# EAGLE board PCB_v1.0 (EAGLE 9.7.0)
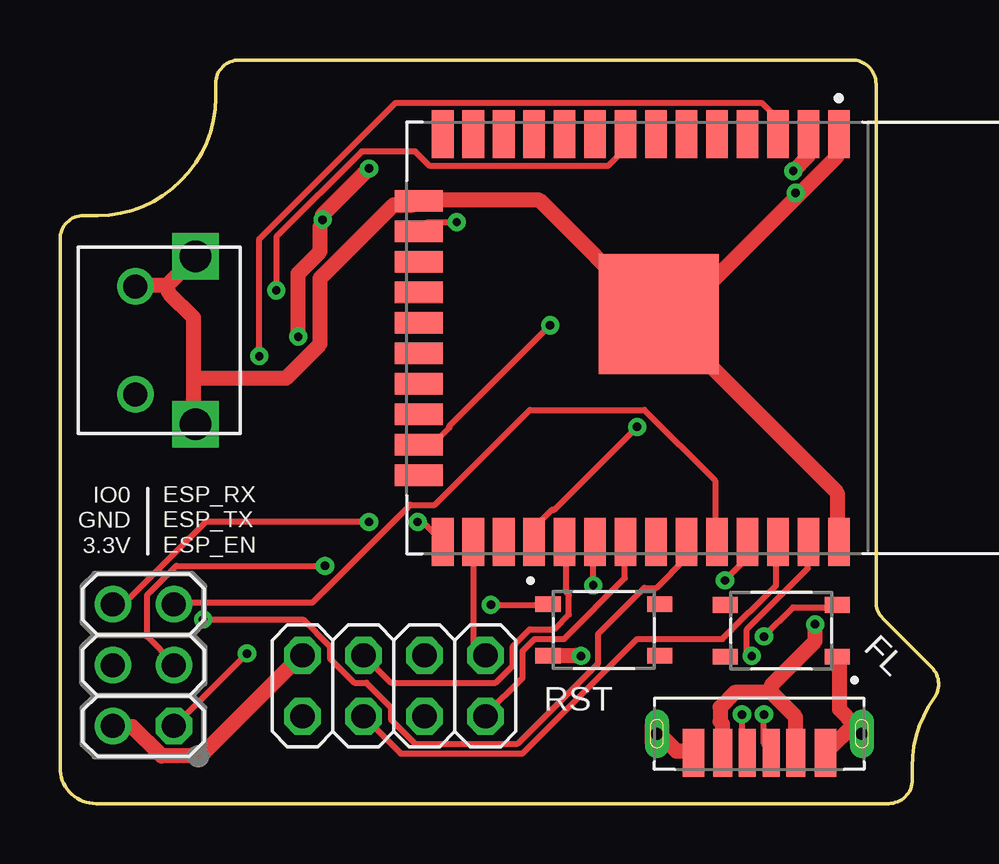
[diagram p0: board, top side]
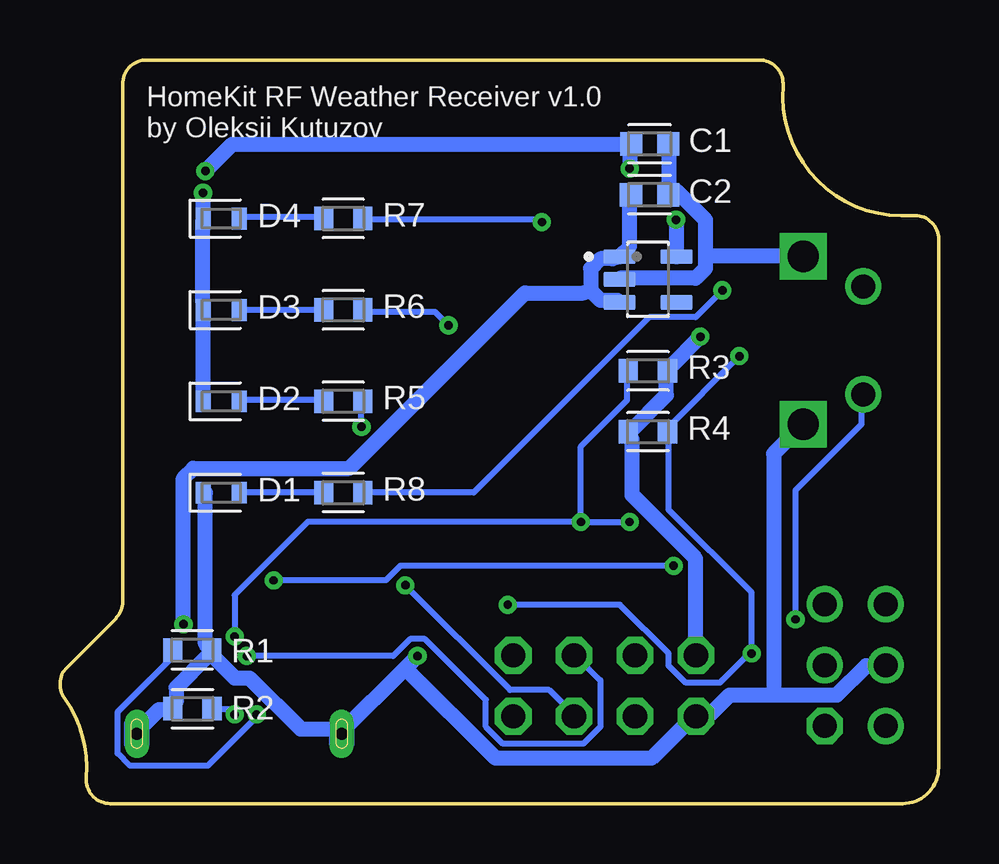
[diagram p1: board, bottom side, seen from below]

Size 36.61 x 31 mm. Coordinates in mm from the lower left corner, seen from the top.
Outline: 34.29,7.71 36.32,5.68 arc-80 36.42,4.4 arc40 35.52,1.08 arc-95 34.52,0 1.5,0 arc-90 0,1.5 0,23.52 arc-95 1.08,24.52 arc100 6.48,29.92 arc-95 7.48,31 33,31 arc-90 34,30 34,8.41 arc45 34.29,7.71
Copper layers (1*16): Top / Bottom
Stack-up Default Layer Stack: Top User Defined 0.035mm / Dielectric-1 User Defined 1.5mm / Bottom User Defined 0.035mm
Design rules "default": minimum track width 6mil, minimum drill 0.35mm, track to track 6mil, track to pad 6mil, pad to pad 6mil, via to via 6mil, smd to smd 6mil, copper to edge 40mil, drill to drill 6mil, minimum pad ring 10mil, minimum via ring 8mil, stop-mask expansion 4mil, vias tented up to drill 0mil, thermal gap 10mil
Net classes: 0 default: width 0.254 mm; 1 5V: width 0.635 mm; 2 GND: width 0.635 mm

## Footprints (pad centres in the part's own frame; a part is rotated, then mirrored left to right if it is on the bottom)
CAPC1608X85 = smd 0.921 x 0.97: 1 -0.775,0; 2 0.775,0
LEDC1608X80N_FLAT-R = smd 0.612 x 0.912: A 0.75,0; C -0.75,0
CUI_UJC-VP-3-SMT-TR = smd 0.7 x 2: A5 0.5,0.8; B5 -0.5,0.8 | smd 0.8 x 2: A9 -1.52,0.8; B9 1.52,0.8 | smd 0.9 x 2: A12 -2.75,0.8; B12 2.75,0.8 | drill 0.5 pad 0.7 long: S1 -4.27,0; S2 4.27,0
2X3-2.54-PLAIN = drill 1 octagon: 1 -2.54,-1.27 | drill 1: 2 -2.54,1.27; 3 0,-1.27; 4 0,1.27; 5 2.54,-1.27; 6 2.54,1.27
2X04 = drill 1.016 octagon: 1 -3.81,-1.27; 2 -3.81,1.27; 3 -1.27,-1.27; 4 -1.27,1.27; 5 1.27,-1.27; 6 1.27,1.27; 7 3.81,-1.27; 8 3.81,1.27
RESC1608X60 = smd 0.799 x 0.974: 1 -0.815,0; 2 0.815,0
SW_SKRPACE010 = smd 1.05 x 0.65: 1 -2.329,1.075; 2 2.329,1.075; 3 -2.329,-1.075; 4 2.329,-1.075
SOT95P285X140-5N = smd 1.35 x 0.6: 1 -1.185,0.95; 2 -1.185,0; 3 -1.185,-0.95; 4 1.185,-0.95; 5 1.185,0.95
MODULE_ESP32-WROOM-32(8MB) = smd 2 x 0.9: 1 -8.5,5.26; 2 -8.5,3.99; 3 -8.5,2.72; 4 -8.5,1.45; 5 -8.5,0.18; 6 -8.5,-1.09; 7 -8.5,-2.36; 8 -8.5,-3.63; 9 -8.5,-4.9; 10 -8.5,-6.17; 11 -8.5,-7.44; 12 -8.5,-8.71; 13 -8.5,-9.98; 14 -8.5,-11.25; 25 8.5,-11.25; 26 8.5,-9.98; 27 8.5,-8.71; 28 8.5,-7.44; 29 8.5,-6.17; 30 8.5,-4.9; 31 8.5,-3.63; 32 8.5,-2.36; 33 8.5,-1.09; 34 8.5,0.18; 35 8.5,1.45; 36 8.5,2.72; 37 8.5,3.99; 38 8.5,5.26 | smd 0.9 x 2: 15 -5.715,-12.25; 16 -4.445,-12.25; 17 -3.175,-12.25; 18 -1.905,-12.25; 19 -0.635,-12.25; 20 0.635,-12.25; 21 1.905,-12.25; 22 3.175,-12.25; 23 4.445,-12.25; 24 5.715,-12.25 | smd 5 x 5: 39 -1,-2.24
SWITCH-MOMENTARY = drill 1.3 square: GND -3.5,2.5; GND_2 3.5,2.5 | drill 1: P$1 -2.25,0; P$2 2.25,0

## Placement (x,y rotation side)
C1  10uF  [CAPC1608X85]  12.04,27.5 0 bottom
C2  10uF  [CAPC1608X85]  12.04,25.38 0 bottom
D1  LED  [LEDC1608X80N_FLAT-R]  29.89,12.96 0 bottom
D2  LED  [LEDC1608X80N_FLAT-R]  29.89,16.77 0 bottom
D3  LED  [LEDC1608X80N_FLAT-R]  29.89,20.58 0 bottom
D4  LED  [LEDC1608X80N_FLAT-R]  29.89,24.39 0 bottom
J1  USB4125-GF-A_REVA  [CUI_UJC-VP-3-SMT-TR]  29.14,2.91 180 top
J3  ESPFLASH-2X3-2.54-PLAIN  [2X3-2.54-PLAIN]  3.48,5.77 90 top
JP1  PINHD-2X4  [2X04]  13.91,4.91 0 top
R1  5.1k  [RESC1608X60]  31.1,6.4 0 bottom
R2  5.1k  [RESC1608X60]  31.09,3.95 180 bottom
R3  4.7K  [RESC1608X60]  12.11,18.04 0 bottom
R4  4.7K  [RESC1608X60]  12.11,15.5 0 bottom
R5  430  [RESC1608X60]  24.81,16.77 0 bottom
R6  430  [RESC1608X60]  24.81,20.58 0 bottom
R7  430  [RESC1608X60]  24.81,24.39 0 bottom
R8  430  [RESC1608X60]  24.81,12.96 0 bottom
S1  SKRPACE010  [SW_SKRPACE010]  30.05,7.21 180 top
S2  SKRPACE010  [SW_SKRPACE010]  22.66,7.24 0 top
U1  AP2112K-3.3TRG1  [SOT95P285X140-5N]  12.11,21.85 0 bottom
U2  ESP32-WROOM-32(8MB)  [MODULE_ESP32-WROOM-32(8MB)]  27.2,19.41 270 top
U$1  MOMENTARY-SWITCH  [SWITCH-MOMENTARY]  3.14,19.31 270 top

## Library data of the parts
C1 C2 = Capacitor; CATEGORY: Capacitor
D1-D4 = LED; CATEGORY: LED; COLOR: RED; DESCRIPTION: CHIP LED FLAT; SUB-CATEGORY: CHIP; TYPE: FLAT_TOP
J1 = UJC-VP-3-SMT-TR; MANUFACTURER: CUI Devices; MAXIMUM_PACKAGE_HEIGHT: 6.5mm; PARTREV: 1.0; STANDARD: Manufacturer Recommendations
J3 = SuperHouse-ESPFlash
JP1 = Connector; CATEGORY: CONNECTOR; SUB-CATEGORY: PIN-HEADER
R1-R8 = Resistor; CATEGORY: Resistor; SUB-CATEGORY: Fixed
S1 S2 = SKRPACE010; MANUFACTURER: ALPS; STANDARD: Maniufacturer Recommendations
U1 = AP2112K-3.3TRG1; MANUFACTURER: Diodes Inc.; PARTREV: 2-2
U2 = ESP32-WROOM-32_8MB_; MANUFACTURER: Espressif Systems; MAXIMUM_PACKAGE_HEIGHT: 3.2mm; PARTREV: 2.7; STANDARD: Manufacturer Recommendations
U$1 = Tactile Switches

## Nets
+3.3V [5V]: C1.1 J3.2 JP1.2 R3.2 R4.1 U1.5 U2.2
+5V [5V]: C2.1 J1.A9 J1.B9 U1.1 U1.3
CC1: J1.A5 R1.1
CC2: J1.B5 R2.1
CSN(5): JP1.4 U2.29
EN: J3.1 R4.2 S2.1 U2.3
ESP_RX: J3.5 U2.34
ESP_TX: J3.3 U2.35
GDO0(22): JP1.3 U2.36
GDO2(4): JP1.8 U2.26
GND [GND]: C1.2 C2.2 D1.C D2.C D3.C D4.C J1.A12 J1.B12 J1.S1 J1.S2 J3.4 JP1.1 R1.2 R2.2 S1.1 S2.3 U1.2 U2.1 U2.15 U2.38 U2.39 U$1.GND U$1.GND_2 U$1.P$1
GPIO0: J3.6 R3.1 S1.3 U2.25
GPIO13: R7.2 U2.16
GPIO15: R6.2 U2.23
GPIO17: R5.2 U2.28
MISO(19): JP1.7 U2.31
MOSI(23): JP1.6 U2.37
N$1: D1.A R8.1
N$2: R8.2 U2.8
N$3: D2.A R5.1
N$4: U2.33 U$1.P$2
N$5: D3.A R6.1
N$7: D4.A R7.1
SCK(18): JP1.5 U2.30

## Tracks (layer width: path | path; a pad name or v marks a point on that pad's centre or on a via)
+3.3V  (via drill 0.35)
  Top 0.635: v30.55,26.37 31.16,26.98 31.16,27.89 U2.2 | v12.87,26.47 10.94,24.54 v10.94,24.34 10.84,24.03 10.84,23.02 9.93,22.1 v9.93,19.46 | J3.2 2.31,3.21 3.02,3.21 4.24,1.99 5.86,1.99 10.03,6.15 JP1.2
  Bottom 0.635: v30.55,26.37 29.43,27.49 12.87,27.49 C1.1 12.87,27.18 v12.87,26.47 | v10.94,24.34 10.94,22.82 U1.5 | JP1.2 10.13,6.25 10.13,10.22 12.77,12.86 12.77,15.2 R4.1 12.87,15.5 11.35,17.02 11.35,18.04 R3.2 11.14,18.24 v9.93,19.46
+5V  (via drill 0.35)
  Top 0.635: 29.64,4.63 28.11,4.63 27.5,4.02 27.5,3.41 27.6,3.31 27.6,2.19 J1.B9 | 29.64,4.63 30.65,3.61 30.65,2.19 J1.A9 | v31.46,7.47 31.46,6.76 29.64,4.93 29.64,4.63
  Bottom 0.635: C2.1 12.87,25.36 12.87,23.22 13.28,22.82 U1.1 13.58,22.71 14.09,22.71 14.5,22.31 14.5,21.39 | 14.5,21.39 14.09,20.99 13.38,20.99 U1.3 | v31.46,7.47 31.46,13.57 31.06,13.98 24.56,13.98 17.24,21.29 14.8,21.29 14.5,21.39
CC1  (via drill 0.35)
  Top 0.254: v28.42,3.71 28.42,2.39 28.62,2.19 J1.A5
  Bottom 0.254: v28.42,3.71 28.42,3.61 30.45,1.58 33.7,1.58 34.21,2.09 34.21,3.82 31.97,6.05 31.97,6.36 R1.1
CC2  (via drill 0.35)
  Top 0.254: v29.33,3.71 29.33,2.49 29.64,2.19 J1.B5
  Bottom 0.254: v29.33,3.71 29.53,3.92 30.25,3.92 R2.1
CSN(5)
  Top 0.254: U2.29 21.1,10.83 21.1,8.79 21.2,8.69 21.2,7.88 20.59,7.27 19.58,7.27 18.87,6.56 18.87,5.75 18.16,5.04 13.79,5.04 12.67,6.15 JP1.4
EN  (via drill 0.35)
  Top 0.254: v7.79,6.25 4.85,3.31 J3.1 | v17.95,8.29 20.29,8.29 S2.1 | v8.3,18.65 8.3,23.53 13.99,29.22 29.23,29.22 29.84,28.61 29.84,28 U2.3
  Bottom 0.254: v17.95,8.29 13.28,8.29 11.25,6.25 11.25,5.75 10.54,5.04 9.11,5.04 7.89,6.25 v7.79,6.25 7.79,8.79 11.25,12.25 11.25,15.5 R4.2 11.35,15.6 v8.3,18.65
ESP_RX
  Top 0.254: U2.34 27.3,10.93 27.3,13.47 24.35,16.41 19.58,16.41 15.62,12.45 14.6,12.45 10.54,8.39 4.85,8.39 J3.5
ESP_TX  (via drill 0.35)
  Top 0.254: v27.71,9.3 28.62,10.22 28.62,10.83 U2.35 | v11.04,9.91 4.85,9.91 3.63,8.69 3.63,6.97 4.74,5.85 J3.3
  Bottom 0.254: v27.71,9.3 23.03,9.3 22.42,9.91 v11.04,9.91
GDO0(22)
  Top 0.254: U2.36 29.84,10.83 29.84,9.1 27.6,6.86 24.05,6.86 19.27,2.09 14.19,2.09 12.67,3.61 JP1.3
GDO2(4)
  Top 0.254: U2.26 17.24,10.83 17.24,6.66 17.65,6.25 JP1.8
GND  (via drill 0.35)
  Top 0.635: U2.38 32.38,10.93 32.38,12.96 24.96,20.38 U2.39 | U2.39 24.66,20.48 19.98,25.15 15.01,25.15 U2.15 14.7,24.95 13.89,24.95 10.84,21.9 10.84,19.16 9.42,17.73 5.56,17.73 | 30.75,25.36 25.57,20.17 U2.39 | 30.75,25.36 32.38,26.98 32.38,27.89 U2.1 | v30.65,25.46 30.75,25.36 | v21.71,6.15 20.39,6.15 S2.3 | J1.B12 26.38,2.19 25.67,2.19 24.96,2.9 J1.S2 | 33.09,3.31 33.39,3 J1.S1 | 33.09,3.31 32.48,3.92 32.48,6.05 S1.1 | 33.09,3.31 31.97,2.19 J1.A12 | 4.44,21.6 3.22,21.6 U$1.P$1 | 4.44,21.6 5.56,22.71 U$1.GND | 5.56,17.73 5.56,20.27 4.54,21.29 4.44,21.6 | 5.56,17.73 5.56,15.91 U$1.GND_2
  Bottom 0.635: D2.C 30.65,16.82 30.65,20.58 D3.C 30.65,20.88 30.65,24.34 D4.C 30.65,24.64 v30.65,25.46 | 22.22,5.64 24.86,3 J1.S2 25.17,3.11 26.59,3.11 28.72,5.24 29.33,5.24 30.14,6.05 R1.2 | 22.22,5.64 v21.71,6.15 | J1.S1 33.39,3 32.48,3.92 31.97,3.92 R2.2 31.77,4.22 31.77,4.83 30.45,6.15 R1.2 | D1.C 30.55,12.96 30.55,6.66 30.35,6.46 R1.2 | 6.88,4.53 8.71,4.53 9.52,3.71 10.03,3.71 JP1.1 10.33,3.51 11.96,1.89 18.46,1.89 22.22,5.64 | 6.88,4.53 4.24,4.53 3.02,5.75 2.31,5.75 J3.4 | C1.2 11.25,27.49 11.25,25.46 C2.2 10.94,25.56 9.72,24.34 9.72,22.82 | 9.72,22.82 9.72,22.31 10.13,21.9 13.28,21.9 U1.2 | 9.72,22.82 5.66,22.82 U$1.GND | 6.88,4.53 6.88,14.59 5.66,15.8 U$1.GND_2
GPIO0  (via drill 0.35)
  Top 0.254: v14.9,11.74 15.11,11.74 15.92,10.93 U2.25 | v29.33,6.97 30.55,8.18 32.38,8.18 S1.3 | v12.87,11.74 6.06,11.74 2.71,8.39 2.31,8.39 J3.6
  Bottom 0.254: v14.9,11.74 14.9,14.89 12.97,16.82 12.97,18.04 R3.1 | v29.33,6.97 29.33,8.69 26.28,11.74 v14.9,11.74 | v14.9,11.74 v12.87,11.74
GPIO13  (via drill 0.35)
  Top 0.254: v16.53,24.24 15.31,24.24 15.01,23.93 U2.16
  Bottom 0.254: v16.53,24.24 16.63,24.34 23.95,24.34 R7.2
GPIO15  (via drill 0.35)
  Top 0.254: U2.23 15.01,14.99 15.55,14.99 16.23,15.67 16.23,15.74 v20.42,19.94
  Bottom 0.254: v20.42,19.94 20.99,20.51 23.93,20.51 R6.2
GPIO17  (via drill 0.35)
  Top 0.254: v24.05,15.7 20.59,12.25 20.49,12.25 19.78,11.54 19.78,10.93 U2.28
  Bottom 0.254: v24.05,15.7 24.05,16.72 R5.2
MISO(19)
  Top 0.254: U2.31 23.54,10.83 23.54,9.4 21,6.86 19.78,6.86 19.27,6.36 19.27,5.24 17.75,3.71 JP1.7
MOSI(23)  (via drill 0.35)
  Top 0.254: v28.82,6.15 28.62,6.36 28.62,7.27 31.16,9.81 31.16,10.83 U2.37
  Bottom 0.254: v28.82,6.15 22.73,6.15 22.02,6.86 21.41,6.86 18.87,4.32 18.87,3.21 18.16,2.49 14.8,2.49 14.09,3.21 14.09,5.14 15.11,6.15 JP1.6
N$1
  Bottom 0.254: R8.1 D1.A
N$2  (via drill 0.35)
  Top 0.254: v9.01,21.39 9.01,23.63 12.57,27.18 14.8,27.18 15.41,26.57 22.83,26.57 23.54,27.29 23.54,27.89 U2.8
  Bottom 0.254: R8.2 19.37,12.96 12.06,20.27 10.13,20.27 v9.01,21.39
N$3
  Bottom 0.254: D2.A 29.13,16.82 25.67,16.82 R5.1
N$4  (via drill 0.35)
  Top 0.254: v5.96,7.68 10.13,7.68 11.25,6.56 11.25,6.05 12.26,5.04 12.77,5.04 13.79,4.02 13.79,3.51 14.8,2.49 19.07,2.49 22.42,5.85 22.42,7.07 24.35,9 24.86,9 26.08,10.22 26.08,10.83 U2.33
  Bottom 0.254: v5.96,7.68 5.96,13.06 3.22,15.8 3.22,17.02 U$1.P$2
N$5
  Bottom 0.254: R6.1 D3.A
N$7
  Bottom 0.254: D4.A 29.13,24.44 25.67,24.44 R7.1
SCK(18)  (via drill 0.35)
  Top 0.254: v22.22,9.1 22.22,10.83 U2.30
  Bottom 0.254: v22.22,9.1 17.85,4.73 16.23,4.73 15.21,3.71 JP1.5

## Text on the board
tNames: IO0 / GND / 3.3V | ESP_RX / ESP_TX / ESP_EN | FL | RST
bNames: HomeKit RF Weather Receiver v1.0 / by Oleksii Kutuzov